# Altium PCB DE-010824.PcbDoc (part 1 of 2)
Units mil, origin at the board's own origin, x right, y up, seen from the top; angles counter-clockwise.
Board outline 4921.26 x 2755.91 mil, 3 copper layers (Top Layer, PWR, Bottom Layer), stack 19.217 mil thick; 221 components, 143 nets, 583 pads, 126 vias.
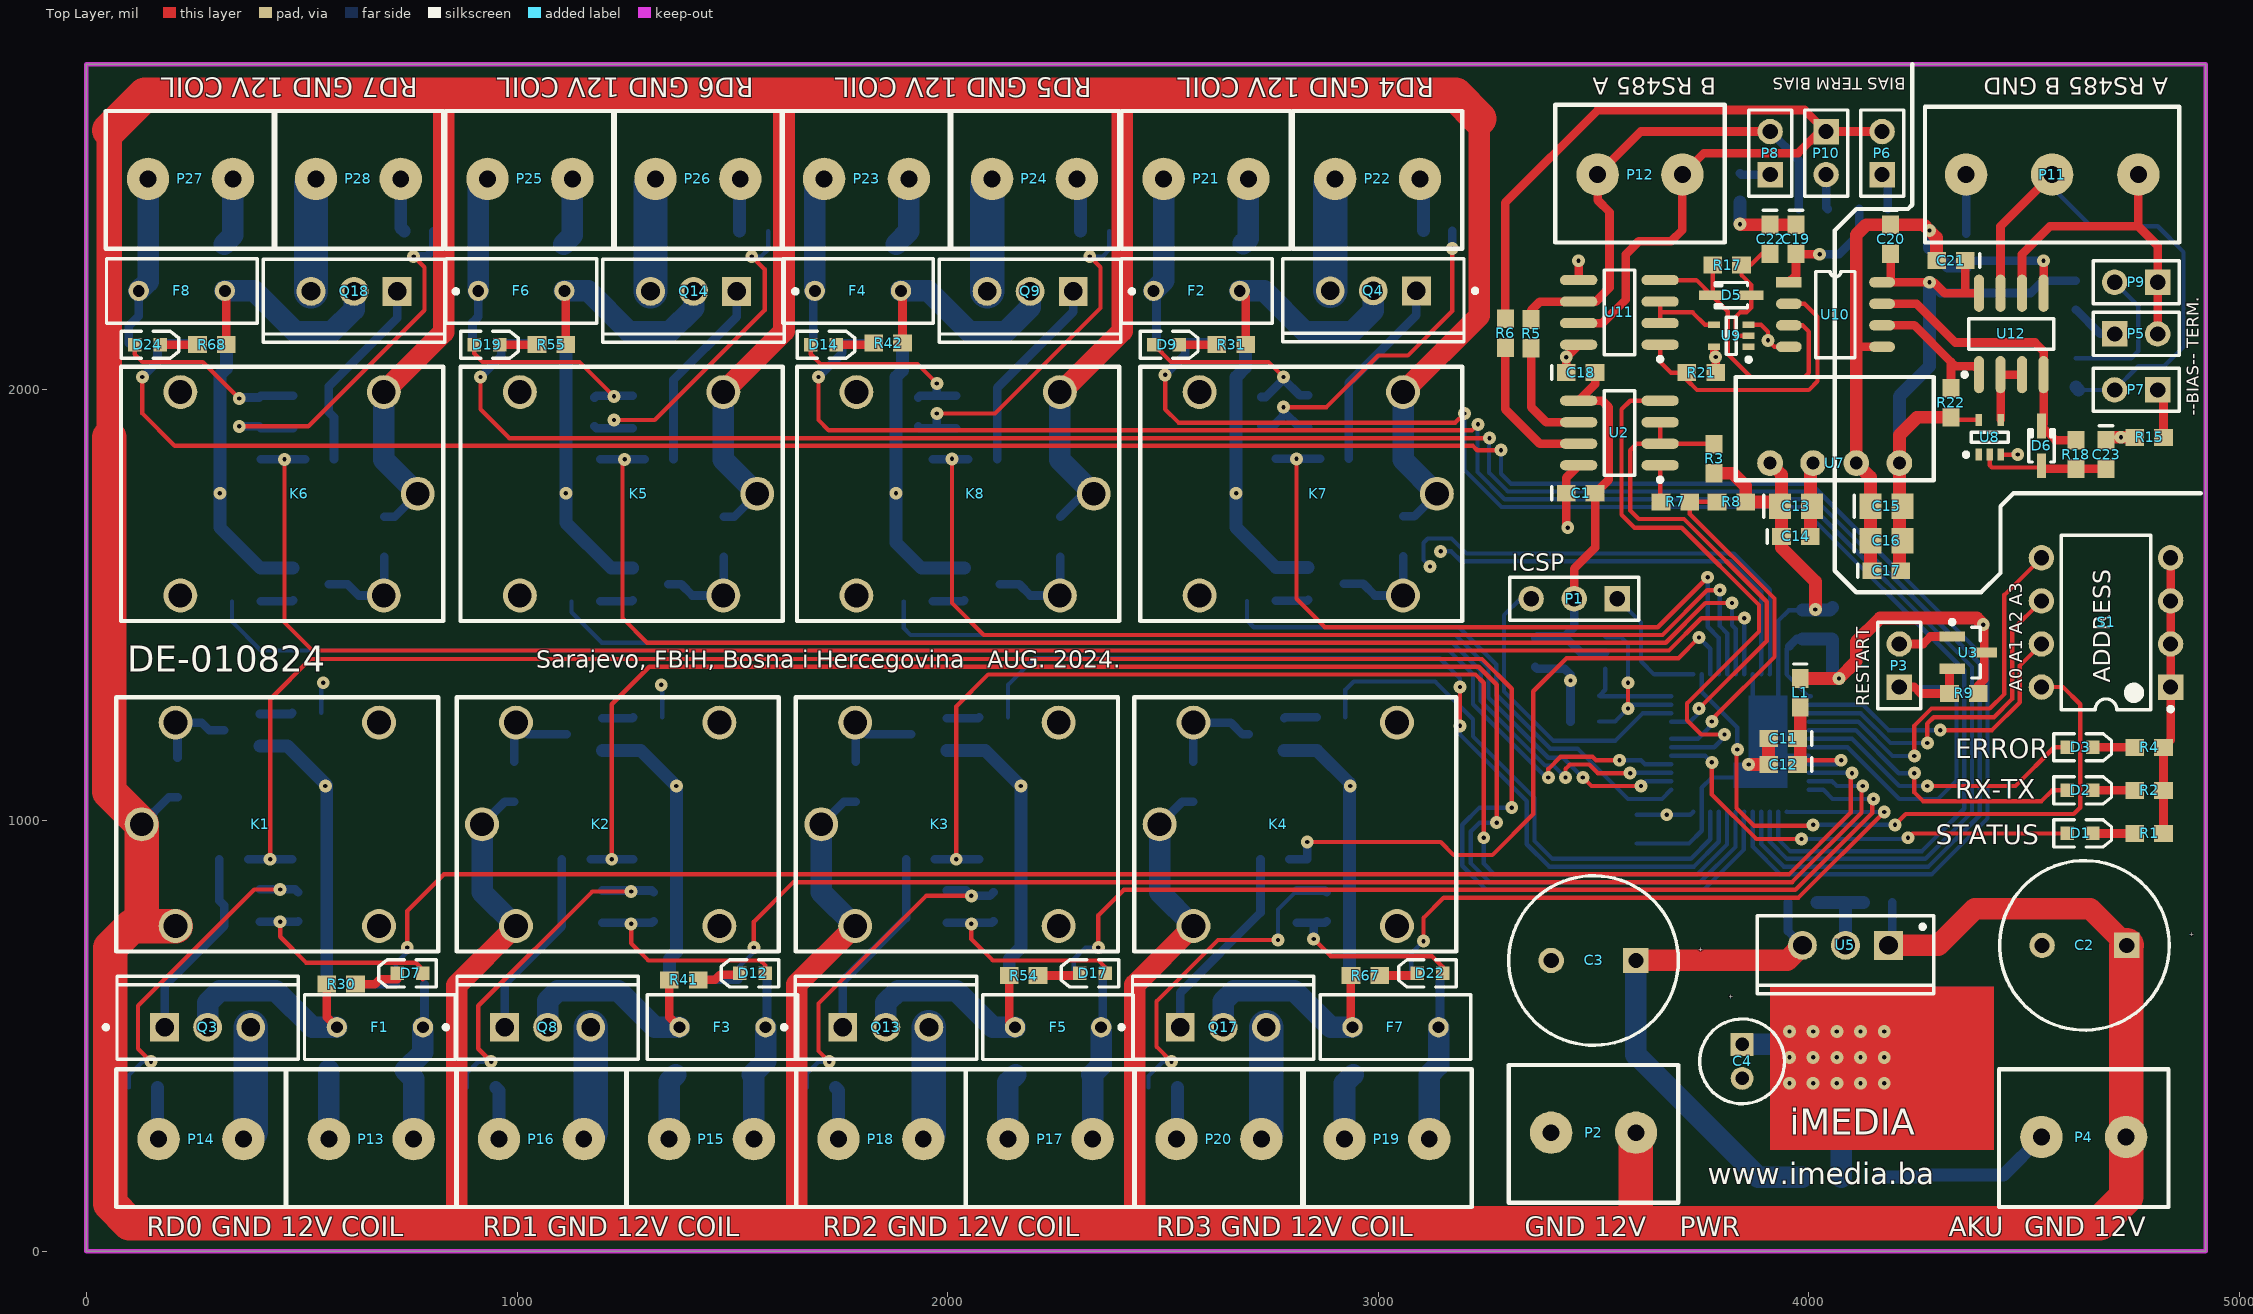
[diagram p0: Top Layer view]
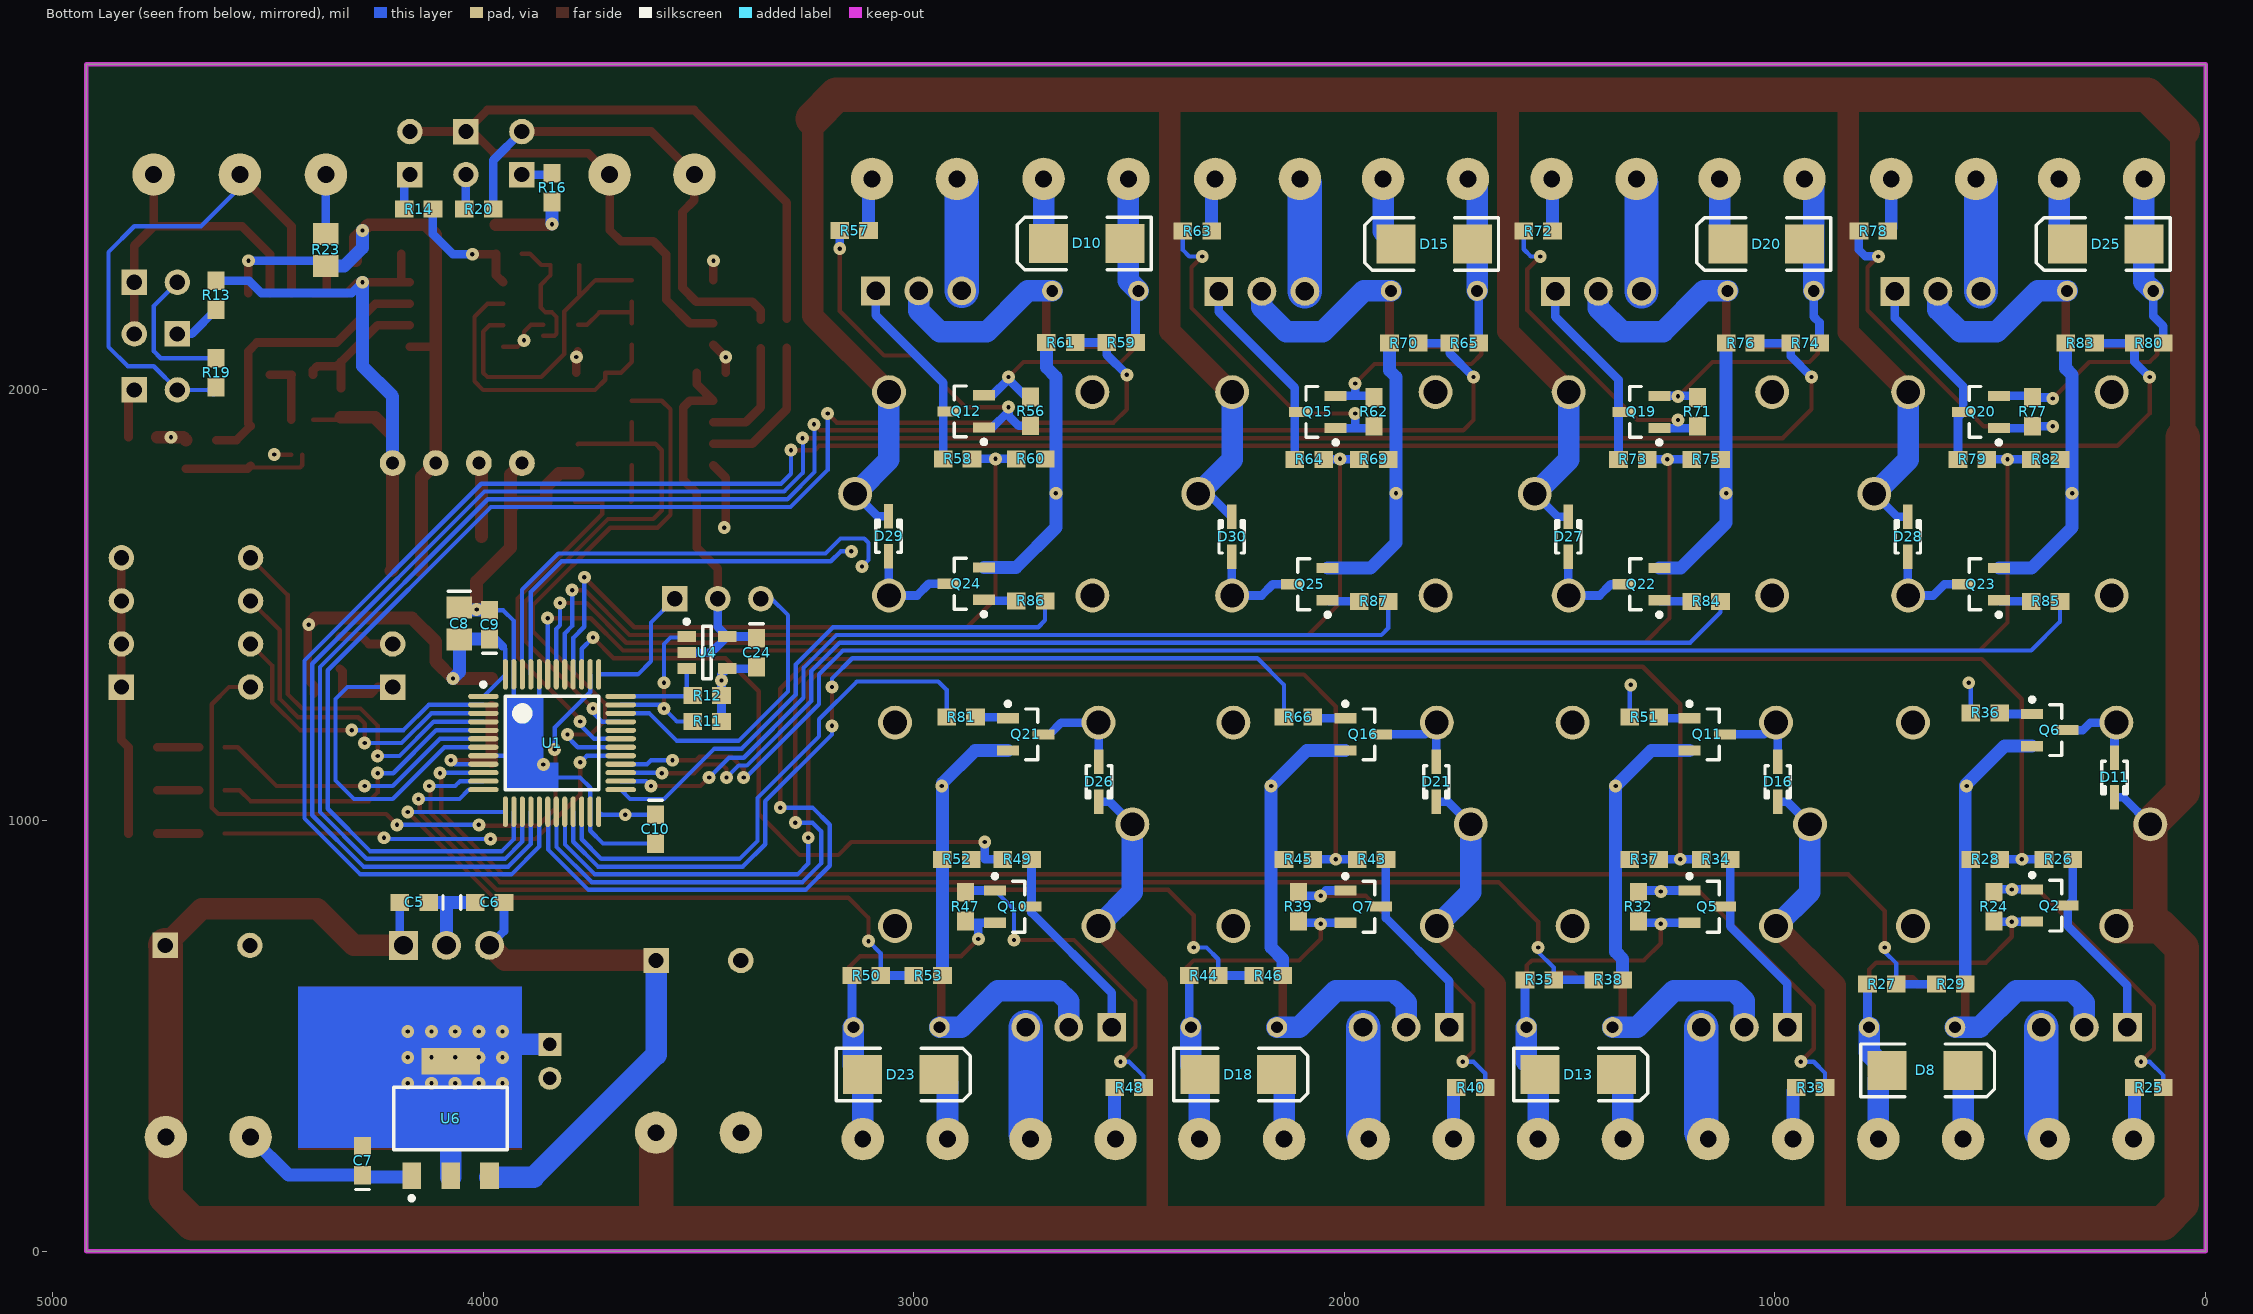
[diagram p1: Bottom Layer view, seen from below]
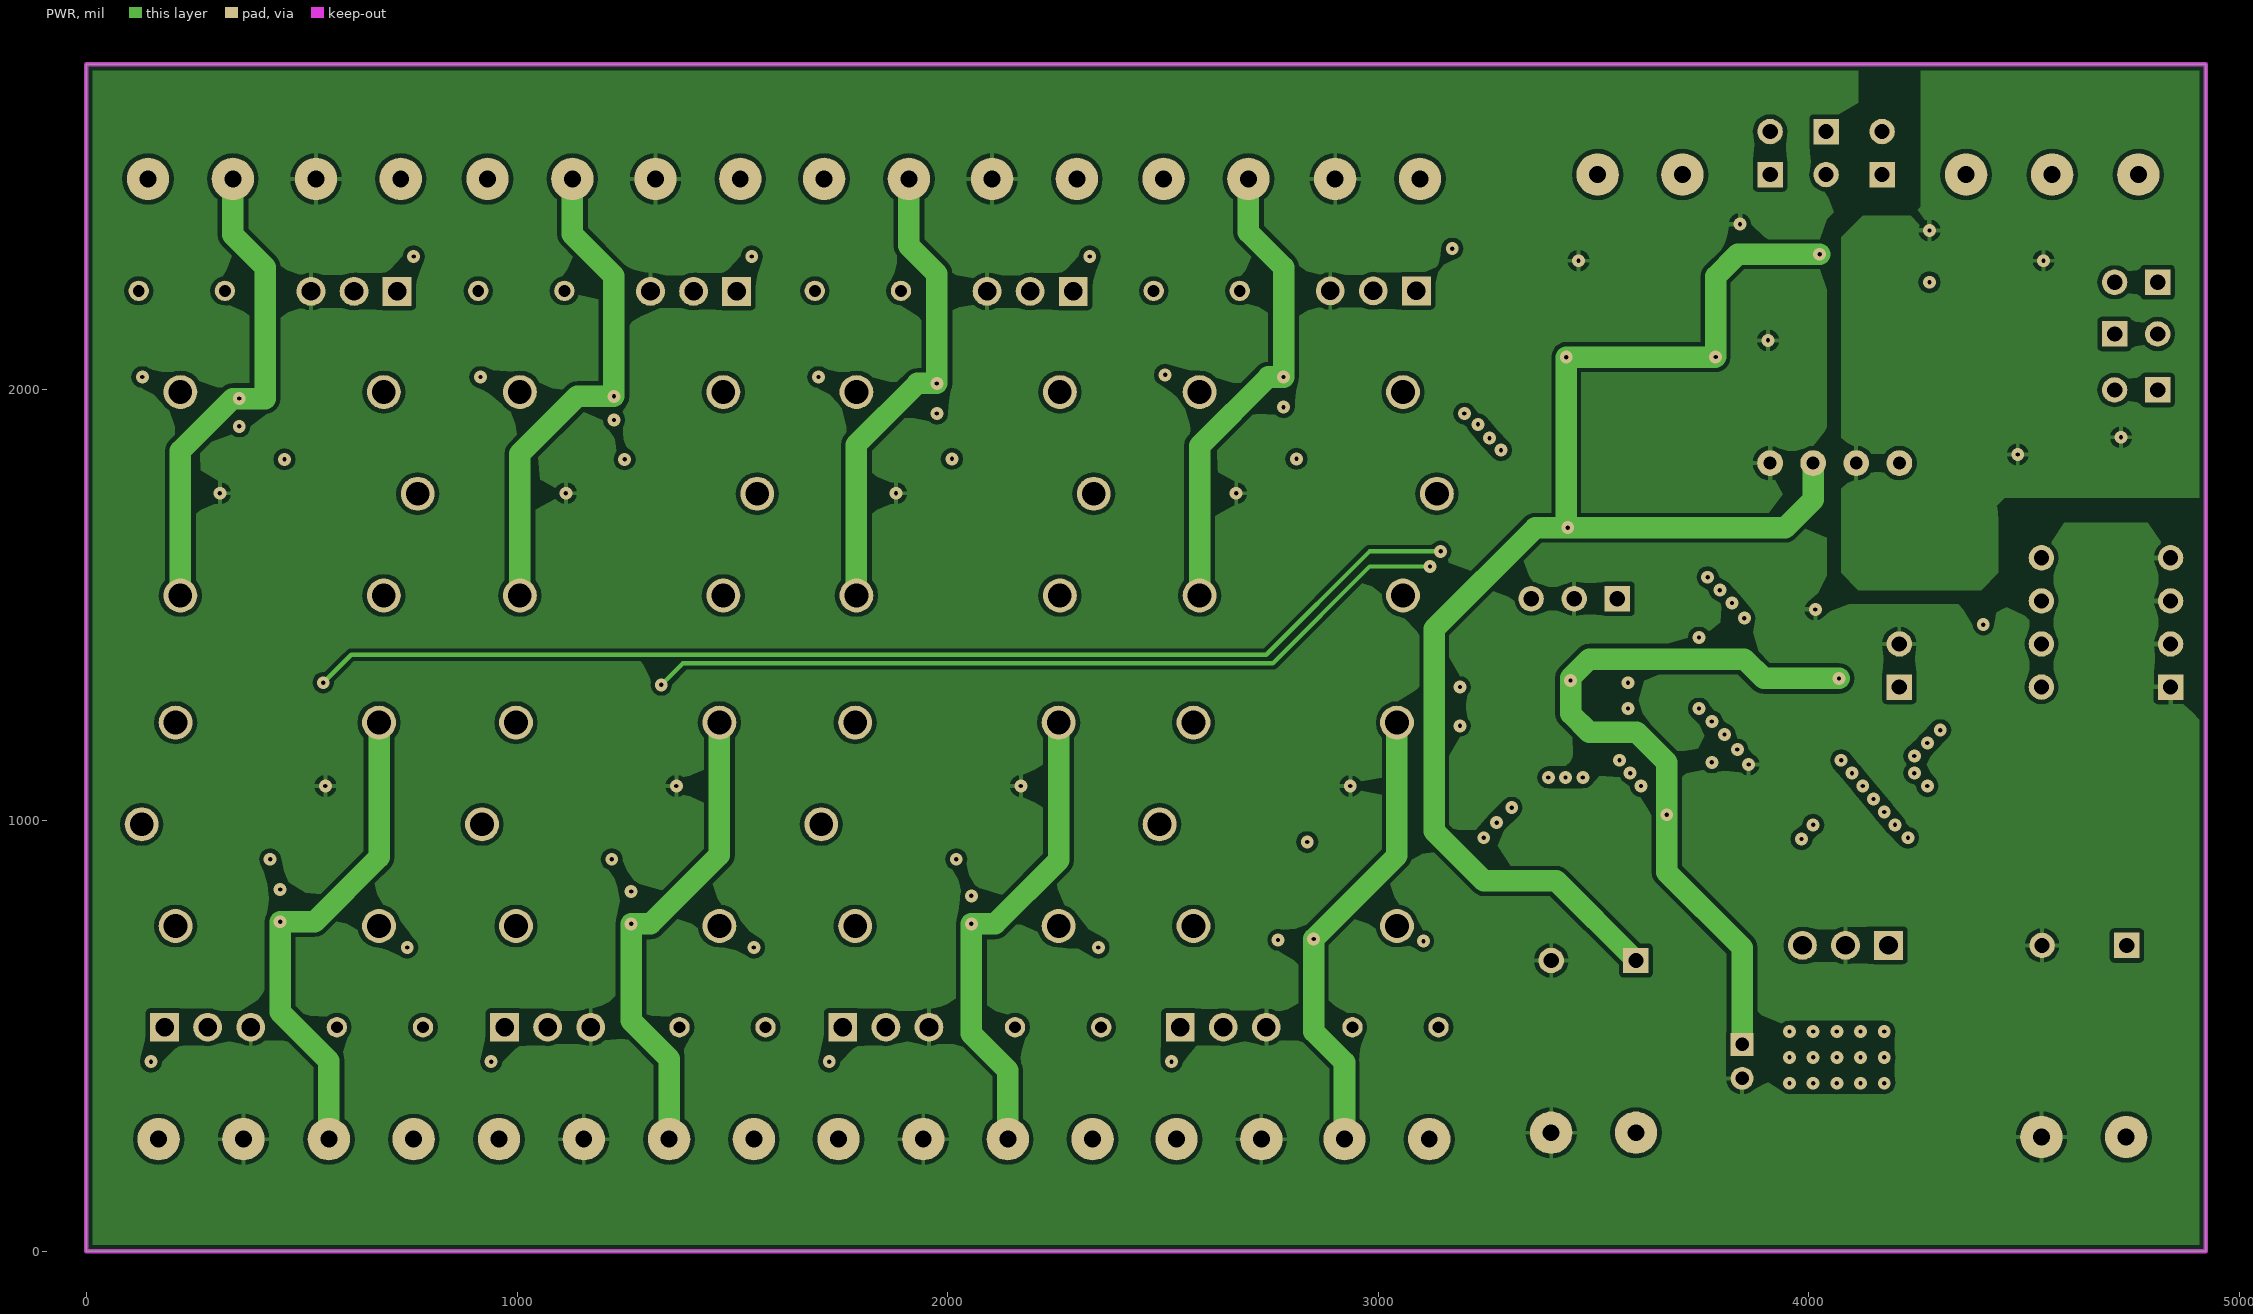
[diagram p2: PWR]

## Layer stack, top to bottom
Top Solder: solder mask 0.4, Solder Resist, Dk 3.5
Top Layer: signal copper 1.4
Dielectric 1: core 10, FR-4, Dk 4.2
PWR: signal copper 1.417
Dielectric 2: prepreg 5, Dk 4.2
Bottom Layer: signal copper 1.4
Bottom Solder: solder mask 0.4, Solder Resist, Dk 3.5

## Board outline
0,0 0,2755.91 4921.26,2755.91 4921.26,0

## Design rules (kind name [scope] priority, off if disabled: settings)
Clearance [All] p1: gap=8 ignorepadtopadclearanceinfootprint=FALSE except(0: Arc-Hole Track-Hole SMDPad-Hole THPad-Hole Via-Hole Fill-Hole Poly-Hole Region-Hole Text-Hole; 5: SMDPad-SMDPad; 10: Arc-Fill Arc-Poly Arc-Region Track-Fill Track-Poly Track-Region SMDPad-Fill SMDPad-Poly SMDPad-Region THPad-Fill THPad-Poly THPad-Region Via-Fill Via-Poly Via-Region Fill-Fill Fill-Poly Fill-Region Poly-Poly Poly-Region Region-Region)
PolygonConnect [All] p1: connectstyle=Relief reliefconductorwidth=10 reliefentries=4 polygonreliefangle="90 Angle" airgapwidth=10
RoutingVias [All] p1: holewidth=28 width=50 viastyle="Through Hole" minholewidth=10 minwidth=30 maxholewidth=28 maxwidth=50
SolderMaskExpansion [All] p1: expansion=4
Width [All] p1: maxlimit=100 minlimit=10 preferedwidth=20
30 further rules are at their usual default settings.

## Classes and differential pairs
component class DE-010824_02: D7 D8 D9 D10 D11 D12 D13 D14 D15 D16 D17 D18 D19 D20 D21 D22 D23 D24 D25 D26 D27 D28 D29 D30 F1 F2 F3 F4 F5 F6 F7 F8 K1 K2 K3 K4 K5 K6 K7 K8 P13 P14 P15 P16 P17 P18 P19 P20 P21 P22 P23 P24 P25 P26 P27 P28 Q2 Q3 Q4 Q5 Q6 Q7 Q8 Q9 Q10 Q11 Q12 Q13 Q14 Q15 Q16 Q17 Q18 Q19 Q20 Q21 Q22 Q23 Q24 Q25 R24 R25 R26 R27 R28 R29 R30 R31 R32 R33 R34 R35 R36 R37 R38 R39 R40 R41 R42 R43 R44 R45 R46 R47 R48 R49 R50 R51 R52 R53 R54 R55 R56 R57 R58 R59 R60 R61 R62 R63 R64 R65 R66 R67 R68 R69 R70 R71 R72 R73 R74 R75 R76 R77 R78 R79 R80 R81 R82 R83 R84 R85 R86 R87
component class DE-010824: C1 C2 C3 C4 C5 C6 C7 C8 C9 C10 C11 C12 C13 C14 C15 C16 C17 C18 C19 C20 C21 C22 C23 C24 D1 D2 D3 D5 D6 L1 P1 P2 P3 P4 P5 P6 P7 P8 P9 P10 P11 P12 R1 R2 R3 R4 R5 R6 R7 R8 R9 R11 R12 R13 R14 R15 R16 R17 R18 R19 R20 R21 R22 R23 S1 U1 U2 U3 U4 U5 U6 U7 U8 U9 U10 U11 U12

## Components (designator, comment, footprint, x,y, rotation, side; value= is the part's Value field where it differs from the comment)
C1 "100nF" 0603 3470,1760 r0 top
C2 "470uF" CAPPR5-10X12.5 4640,710 r180 top
C3 "470uF" CAPPR5-10X12.5 3500,675 r180 top
C4 "22uF" CAPPR2-5X11 3845,440.63 r270 top value=47uF
C5 "100nF" 0603 4160,810 r0 bottom
C6 "100nF" 0603 3985,810 r180 bottom
C7 "100nF" 0603 4280,210 r90 bottom
C8 "10uF" 0805 4055,1457.4 r270 bottom
C9 "100nF" 0603 3985,1455 r90 bottom
C10 "100nF" 0603 3600,980 r270 bottom
C11 "100nF" 0603 3940,1190 r180 top
C12 "1uF" 0603 3940,1130 r180 top value=100nF
C13 "10uF" 0805 3970,1730 r0 top
C14 "100nF" 0603 3970,1660 r0 top
C15 "22uF" 0805 4180,1730 r0 top value=10uF
C16 "22uF" 0805 4180,1650 r0 top value=10uF
C17 "100nF" 0603 4180,1580 r0 top
C18 "100nF" 0603 3470,2040 r0 top
C19 "100nF" 0603 3970,2350 r270 top
C20 "100nF" 0603 4190,2350 r270 top
C21 "100nF" 0603 4330,2300 r180 top
C22 "100pF" 0603 3910,2350 r270 top
C23 "100pF" 0603 4690,1850 r270 top
C24 "100nF" 0603 3365,1390 r270 bottom
D1 "STATUS_LED" 1.6X0.8X0.8 4630,970 r0 top
D2 "STATUS_LED" 1.6X0.8X0.8 4630,1070 r0 top
D3 "STATUS_LED" 1.6X0.8X0.8 4630,1170 r0 top
D5 "1N4148" SOD323 3820,2220 r180 top
D6 "1N4148" SOD323 4540,1870 r90 top
D7 "DOOR_0" 1.6X0.8X0.8 751.57,645 r180 top
D8 "1N4001" SMB 651.57,420 r180 bottom
D9 "DOOR_4" 1.6X0.8X0.8 2508.43,2105 r0 top
D10 "1N4001" SMB 2598.43,2340 r0 bottom
D11 "1N4148" SOD323 211.57,1100 r270 bottom
D12 "DOOR_1" 1.6X0.8X0.8 1547.15,645 r180 top
D13 "1N4001" SMB 1457.15,410 r180 bottom
D14 "DOOR_5" 1.6X0.8X0.8 1711.57,2105 r0 top
D15 "1N4001" SMB 1791.57,2338.78 r0 bottom
D16 "1N4148" SOD323 993.69,1090 r270 bottom
D17 "DOOR_2" 1.6X0.8X0.8 2336.54,645 r180 top
D18 "1N4001" SMB 2246.54,410 r180 bottom
D19 "DOOR_6" 1.6X0.8X0.8 930,2105 r0 top
D20 "1N4001" SMB 1020,2338.78 r0 bottom
D21 "1N4148" SOD323 1786.54,1090 r270 bottom
D22 "DOOR_3" 1.6X0.8X0.8 3120,645 r180 top
D23 "1N4001" SMB 3030,410 r180 bottom
D24 "DOOR_7" 1.6X0.8X0.8 141.57,2105 r0 top
D25 "1N4001" SMB 231.57,2338.78 r0 bottom
D26 "1N4148" SOD323 2570,1090 r270 bottom
D27 "1N4148" SOD323 1480,1658.78 r90 bottom
D28 "1N4148" SOD323 691.57,1658.78 r90 bottom
D29 "1N4148" SOD323 3058.43,1660 r90 bottom
D30 "1N4148" SOD323 2261.57,1658.78 r90 bottom
F1 "Fuse Thermal" RAD-0.2 681.57,520 r0 top
F2 "Fuse Thermal" RAD-0.2 2578.43,2230 r180 top
F3 "Fuse Thermal" RAD-0.2 1477.15,520 r0 top
F4 "Fuse Thermal" RAD-0.2 1791.57,2230 r180 top
F5 "Fuse Thermal" RAD-0.2 2256.54,520 r0 top
F6 "Fuse Thermal" RAD-0.2 1010,2230 r180 top
F7 "Fuse Thermal" RAD-0.2 3040,520 r0 top
F8 "Fuse Thermal" RAD-0.2 221.57,2230 r180 top
K1 "SRD-12VDC-SL-O" SRD-12VDC-SL-O 443.35,991.22 r0 top
K2 "SRD-12VDC-SL-O" SRD-12VDC-SL-O 1233.74,991.22 r0 top
K3 "SRD-12VDC-SL-O" SRD-12VDC-SL-O 2021.5,991.22 r0 top
K4 "SRD-12VDC-SL-O" SRD-12VDC-SL-O 2807.17,991.22 r0 top
K5 "SRD-12VDC-SL-O" SRD-12VDC-SL-O 1242.83,1758.78 r180 top
K6 "SRD-12VDC-SL-O" SRD-12VDC-SL-O 454.41,1758.78 r180 top
K7 "SRD-12VDC-SL-O" SRD-12VDC-SL-O 2821.26,1758.78 r180 top
K8 "SRD-12VDC-SL-O" SRD-12VDC-SL-O 2024.41,1758.78 r180 top
L1 "BLM15AG121" 0603 3980,1296.54 r270 top
P1 "ICSP" HDR1X3 3555,1515 r180 top
P2 "AKU" "TERMINAL BLOK 2" 3500,275 r270 top
P3 "RESET" HDR1X2 4210,1310 r90 top
P4 "PWR_IN" "TERMINAL BLOK 2" 4638.43,265 r270 top
P5 "BIAS" HDR1X2 4710,2130 r0 top
P6 "BIAS" HDR1X2 4170,2500 r90 top
P7 "BIAS" HDR1X2 4810,2000 r180 top
P8 "BIAS" HDR1X2 3910,2500 r90 top
P9 "TERM." HDR1X2 4810,2250 r180 top
P10 "TERM." HDR1X2 4040,2600 r270 top
P11 "RS485" "TERMINAL BLOK 3" 4565,2500 r270 top
P12 "RS485" "TERMINAL BLOK 2" 3607.91,2500 r90 top
P13 "DOOR_0" "TERMINAL BLOK 2" 661.57,260 r90 top
P14 "GND" "TERMINAL BLOK 2" 266.19,260 r90 top
P15 "DOOR_0" "TERMINAL BLOK 2" 1451.57,260 r90 top
P16 "GND" "TERMINAL BLOK 2" 1056.57,260 r90 top
P17 "DOOR_0" "TERMINAL BLOK 2" 2238.11,260 r90 top
P18 "GND" "TERMINAL BLOK 2" 1844.96,260 r90 top
P19 "DOOR_0" "TERMINAL BLOK 2" 3020,260 r90 top
P20 "GND" "TERMINAL BLOK 2" 2630,260 r90 top
P21 "DOOR_0" "TERMINAL BLOK 2" 2600,2490 r270 top
P22 "GND" "TERMINAL BLOK 2" 2998.43,2490 r270 top
P23 "DOOR_0" "TERMINAL BLOK 2" 1811.57,2490 r270 top
P24 "GND" "TERMINAL BLOK 2" 2201.57,2490 r270 top
P25 "DOOR_0" "TERMINAL BLOK 2" 1030,2490 r270 top
P26 "GND" "TERMINAL BLOK 2" 1420,2490 r270 top
P27 "DOOR_0" "TERMINAL BLOK 2" 241.57,2490 r270 top
P28 "GND" "TERMINAL BLOK 2" 631.57,2490 r270 top
Q2 "BC807" SOT23_N 361.57,802.6 r180 bottom
Q3 "NDF10N60ZG" ONSC-TO-220-3-221D-03 281.57,520 r90 top
Q4 "NDF10N60ZG" ONSC-TO-220-3-221D-03 2988.43,2230 r270 top
Q5 "BC807" SOT23_N 1157.15,800 r180 bottom
Q6 "BC817" SOT23_N 361.57,1210 r180 bottom
Q7 "BC807" SOT23_N 1956.54,800 r180 bottom
Q8 "NDF10N60ZG" ONSC-TO-220-3-221D-03 1071.15,520 r90 top
Q9 "NDF10N60ZG" ONSC-TO-220-3-221D-03 2191.57,2228.78 r270 top
Q10 "BC807" SOT23_N 2770,800 r180 bottom
Q11 "BC817" SOT23_N 1157.15,1200 r180 bottom
Q12 "BC807" SOT23_N 2878.43,1950 r0 bottom
Q13 "NDF10N60ZG" ONSC-TO-220-3-221D-03 1856.54,520 r90 top
Q14 "NDF10N60ZG" ONSC-TO-220-3-221D-03 1410,2228.78 r270 top
Q15 "BC807" SOT23_N 2061.57,1948.78 r0 bottom
Q16 "BC817" SOT23_N 1956.54,1200 r180 bottom
Q17 "NDF10N60ZG" ONSC-TO-220-3-221D-03 2640,520 r90 top
Q18 "NDF10N60ZG" ONSC-TO-220-3-221D-03 621.57,2228.78 r270 top
Q19 "BC807" SOT23_N 1310,1948.78 r0 bottom
Q20 "BC807" SOT23_N 521.57,1948.78 r0 bottom
Q21 "BC817" SOT23_N 2740,1200 r180 bottom
Q22 "BC817" SOT23_N 1310,1548.78 r0 bottom
Q23 "BC817" SOT23_N 521.57,1548.78 r0 bottom
Q24 "BC817" SOT23_N 2878.43,1550 r0 bottom
Q25 "BC817" SOT23_N 2080.24,1548.78 r0 bottom
R1 "2K2" ERA-0603 4790,970 r180 top
R2 "2K2" ERA-0603 4790,1070 r180 top
R3 "10K" ERA-0603 3780,1840 r90 top
R4 "2K2" ERA-0603 4790,1170 r180 top
R5 "10R" ERA-0603 3355,2130 r270 top
R6 "10R" ERA-0603 3295,2131.54 r270 top
R7 "1K2" ERA-0603 3690,1740 r180 top
R8 "2K2" ERA-0603 3820,1740 r0 top
R9 "10K" ERA-0603 4360,1295 r0 top
R11 "2K2" ERA-0603 3480,1230 r180 bottom
R12 "2K2" ERA-0603 3480,1290 r180 bottom
R13 "4K7" ERA-0603 4620,2220 r90 bottom
R14 "4K7" ERA-0603 4150,2420 r180 bottom
R15 "4K7" ERA-0603 4790,1890 r180 top
R16 "4K7" ERA-0603 3840,2470 r270 bottom
R17 "10K" ERA-0603 3810,2290 r180 top
R18 "10K" ERA-0603 4620,1850 r90 top
R19 "120R" ERA-0603 4620,2040 r90 bottom
R20 "120R" ERA-0603 4010,2420 r0 bottom
R21 "4K7" ERA-0603 3750,2040 r0 top
R22 "4K7" ERA-0603 4330,1970 r270 top
R23 "100R" ERA-0805 4365,2325 r90 bottom
R24 "10K" ERA-0603 491.57,800 r270 bottom
R25 "10K" ERA-0603 131.57,380 r180 bottom
R26 "12K" ERA-0603 341.95,910 r0 bottom
R27 "12K" ERA-0603 751.57,620 r180 bottom
R28 "4K7" ERA-0603 511.57,910 r180 bottom
R29 "4K7" ERA-0603 591.57,620 r0 bottom
R30 "2K2" ERA-0603 591.57,620 r180 top
R31 "2K2" ERA-0603 2658.43,2105 r0 top
R32 "10K" ERA-0603 1317.15,800 r270 bottom
R33 "10K" ERA-0603 917.15,380 r180 bottom
R34 "12K" ERA-0603 1137.53,910 r0 bottom
R35 "12K" ERA-0603 1547.15,630 r180 bottom
R36 "1K" ERA-0603 511.57,1250 r0 bottom
R37 "4K7" ERA-0603 1303.69,910 r180 bottom
R38 "4K7" ERA-0603 1387.15,630 r0 bottom
R39 "10K" ERA-0603 2106.54,800 r270 bottom
R40 "10K" ERA-0603 1706.54,380 r180 bottom
R41 "2K2" ERA-0603 1387.15,630 r180 top
R42 "2K2" ERA-0603 1861.57,2108.78 r0 top
R43 "12K" ERA-0603 1936.91,910 r0 bottom
R44 "12K" ERA-0603 2326.54,640 r180 bottom
R45 "4K7" ERA-0603 2106.54,910 r180 bottom
R46 "4K7" ERA-0603 2176.54,640 r0 bottom
R47 "10K" ERA-0603 2880,800 r270 bottom
R48 "10K" ERA-0603 2500,380 r180 bottom
R49 "12K" ERA-0603 2760,910 r0 bottom
R50 "12K" ERA-0603 3110,640 r180 bottom
R51 "1K" ERA-0603 1303.69,1240 r0 bottom
R52 "4K7" ERA-0603 2900,910 r180 bottom
R53 "4K7" ERA-0603 2966.54,640 r0 bottom
R54 "2K2" ERA-0603 2176.54,640 r180 top
R55 "2K2" ERA-0603 1080,2105 r0 top
R56 "10K" ERA-0603 2728.43,1950 r90 bottom
R57 "10K" ERA-0603 3138.43,2370 r0 bottom
R58 "12K" ERA-0603 2898.05,1840 r180 bottom
R59 "12K" ERA-0603 2518.43,2110 r0 bottom
R60 "4K7" ERA-0603 2728.43,1840 r0 bottom
R61 "4K7" ERA-0603 2658.43,2110 r180 bottom
R62 "10K" ERA-0603 1931.57,1948.78 r90 bottom
R63 "10K" ERA-0603 2341.57,2368.78 r0 bottom
R64 "12K" ERA-0603 2081.57,1838.78 r180 bottom
R65 "12K" ERA-0603 1721.57,2108.78 r0 bottom
R66 "1K" ERA-0603 2106.54,1240 r0 bottom
R67 "2K2" ERA-0603 2970,640 r180 top
R68 "2K2" ERA-0603 291.57,2105 r0 top
R69 "4K7" ERA-0603 1931.57,1838.78 r0 bottom
R70 "4K7" ERA-0603 1861.57,2108.78 r180 bottom
R71 "10K" ERA-0603 1180,1948.78 r90 bottom
R72 "10K" ERA-0603 1550,2368.78 r0 bottom
R73 "12K" ERA-0603 1330,1838.78 r180 bottom
R74 "12K" ERA-0603 930,2108.78 r0 bottom
R75 "4K7" ERA-0603 1160,1838.78 r0 bottom
R76 "4K7" ERA-0603 1080,2108.78 r180 bottom
R77 "10K" ERA-0603 401.57,1948.78 r90 bottom
R78 "10K" ERA-0603 771.57,2368.78 r0 bottom
R79 "12K" ERA-0603 541.57,1838.78 r180 bottom
R80 "12K" ERA-0603 131.57,2108.78 r0 bottom
R81 "1K" ERA-0603 2890,1240 r0 bottom
R82 "4K7" ERA-0603 371.57,1838.78 r0 bottom
R83 "4K7" ERA-0603 291.57,2108.78 r180 bottom
R84 "1K" ERA-0603 1160,1508.78 r180 bottom
R85 "1K" ERA-0603 371.57,1508.78 r180 bottom
R86 "1K" ERA-0603 2728.43,1510 r180 bottom
R87 "1K" ERA-0603 1931.57,1508.78 r180 bottom
S1 "SW-DIP4" DIP-8 4690,1460 r180 top
U1 "STM32F030C8T6" STM-LQFP48_N 3840,1180 r180 bottom
U2 "SN75176BD" D008_N 3560,1900 r180 top
U3 "TLV803MDBZR" DBZ3_N 4370,1390 r0 top
U4 "24AA01T-I/OT" SOT-23-OT5_N 3480,1390 r180 bottom
U5 "L7805CV" TO220 4085,710 r180 top
U6 "REG1117-3.3" ZZ311 4075.55,307.87 r180 bottom
U7 "B0505S/D-1W" B0505S-1W 3910,1830 r0 top
U8 "SN74LVC1G14" 419A-01_N 4420,1890 r90 top
U9 "SN74LVC1G14" 419A-01_N 3819.65,2125.59 r180 top
U10 "Si8421" SOP8 3953.46,2250 r0 top
U11 "SN75176BD" D008_N 3560,2180 r180 top
U12 "SN75176BD" D008_N 4470,2130 r90 top

## Footprints (in the part's own frame and the unit in brackets; to place one, negate y for a bottom-side part, rotate by r counter-clockwise, add the part's x,y. Pads: shape width x height; smd on the part's side, far side on the other; paste and mask are expansions set on the pad)
1.6X0.8X0.8 [mm] "SM LED; 2 Flat Leads"
  rect 0.8x0.8 smd: 1(-0.75,0) 2(0.75,0)
  silkscreen extent -1.55,-0.8 1.85,0.8
419A-01_N [mm] "SOT353, 5-Leads, Body 2x1.3mm, Pitch 0.65mm, Lead Span 2.1mm, IPC Medium Density"
  rect 0.7x0.4 smd: 1(-1.025,0.65) 2(-1.025,0) 3(-1.025,-0.65) 4(1.025,-0.65) 5(1.025,0.65)
  silkscreen extent -1.15,-1.1 0.3,1.52, body extent -0.7,-1.1 0.7,1.1, height 1.1
0603 [mm] "Chip Capacitor; Body 1.6 x 0.8 mm (LxW typ)"
  rect 1.1x1 smd: 1(-0.85,0) 2(0.85,0)
  silkscreen extent -1.7,-0.4 -1.7,0.4
0805 [mm] "Chip Capacitor; Body 2.0 x 1.2 mm (LxW typ)"
  rect 1.3x1.5 smd: 1(-0.95,0) 2(0.95,0)
  silkscreen extent -1.9,-0.65 -1.9,0.65
B0505S-1W [mil] "Isolated DC DC converter"
  round 60 hole 30: 1(0,0) 2(100,0) 3(200,0) 4(300,0)
  silkscreen extent -80,-40 380,200, body extent -80,-40 380,200, height 394
CAPPR2-5X11 [mm] "Capacitor, Electrolytic, Radial; Body 5 x 11 mm (Dia.xH typ); Pin Spacing 2 mm (typ)"
  rect 1.35x1.35 hole 0.8: 1(-1,0)
  round 1.35 hole 0.8: 2(1,0)
  silkscreen extent -2.5,-2.5 2.5,2.5
CAPPR5-10X12.5 [mm] "Capacitor, Electrolytic, Radial; Body 10 x 12.5 mm (Dia.xH typ); Pin Spacing 5 mm (typ)"
  rect 1.5x1.5 hole 0.9: 1(-2.5,0)
  round 1.5 hole 0.9: 2(2.5,0)
  silkscreen extent -5,-5 5,5, body extent -5,-5 5,5, height 12.5
D008_N [mm] "SOIC, 8-Leads, Body 4.9x3.9mm, Pitch 1.27mm, IPC Medium Density"
  oval 2.2x0.6 smd: 1(-2.4,1.905) 2(-2.4,0.635) 3(-2.4,-0.635) 4(-2.4,-1.905) 5(2.4,-1.905) 6(2.4,-0.635) 7(2.4,0.635) 8(2.4,1.905)
  silkscreen extent -2.53,-2.5 0.9,2.88, body extent -1.95,-2.45 1.95,2.45, height 1.75
DBZ3_N [mm] "SOT23, 3-Leads, Body 2.9x1.3mm, Pitch 0.95mm, Lead Span 2.4mm, IPC Medium Density"
  rect 1.5x0.6 smd: 1(-0.95,0.95) 2(-0.95,-0.95) 3(0.95,0)
  silkscreen extent -1.07,-1.5 0.7,1.92, body extent -0.7,-1.52 0.7,1.52, height 1.12
DIP-8 [mm] "DIP; 8 Leads; Row Spacing 7.62 mm; Pitch 2.54 mm"
  rect 1.5x1.5 hole 0.9: 1(-3.81,3.81)
  round 1.5 hole 0.9: 2(-3.81,1.27) 3(-3.81,-1.27) 4(-3.81,-3.81) 5(3.81,-3.81) 6(3.81,-1.27) 7(3.81,1.27) 8(3.81,3.81)
  silkscreen extent -3.94,-5.15 2.65,5.23, body extent -3.6,-5.15 3.6,5.15, height 5.08
ERA-0603 [mm] "Chip Resistor; Body 1.6 x 0.8 mm (LxW typ)"
  rect 1.1x1 smd: 1(-0.85,0) 2(0.85,0)
ERA-0805 [mm] "Chip Resistor; Body 2 x 1.3 mm (LxW typ)"
  rect 1.3x1.5 smd: 1(-0.95,0) 2(0.95,0)
HDR1X2 [mm] "Connector; Header; 2 Position"
  rect 1.5x1.5 hole 0.9: 1(0,0)
  round 1.5 hole 0.9: 2(2.54,0)
  silkscreen extent -1.27,-1.27 3.81,1.27
HDR1X3 [mm] "Connector; Header; 3 Position"
  rect 1.5x1.5 hole 0.9: 1(0,0)
  round 1.5 hole 0.9: 2(2.54,0) 3(5.08,0)
  silkscreen extent -1.27,-1.27 6.35,1.27
ONSC-TO-220-3-221D-03 [mm] "FM, 3-Leads, Body 10.65x4.9mm, Pitch 2.54mm"
  rect 1.7x1.7 hole 1.1: 1(0,2.54)
  round 1.7 hole 1.1: 2(0,0) 3(0,-2.54)
  silkscreen extent -1.89,-5.35 3.01,6.12, body extent -1.89,-5.33 3.01,5.33, height 19.55
RAD-0.2 [mm] "Radial Cap, Thru-Hole; 2 Leads; 0.2 in Pin Spacing"
  round 1.2 hole 0.7: 1(-2.54,0) 2(2.54,0)
  silkscreen extent -4.44,-1.91 4.44,1.91
SMB [mm] "DO-214-AA/SMB; 2 C-Bend Leads; Body 5.3 x 3.6 mm, inc. leads (LxW)"
  rect 2.3x2.3 smd: 1(-2.25,0) 2(2.25,0)
  silkscreen extent -3.8,-1.55 4.1,1.55
SOD323 [mm] "SOD-323/SC-76; 2 Leads; Body 1.7 x 1.3 mm, (LxW)"
  rect 1.45x0.55 smd: 1(1.175,0) 2(-1.175,0)
  silkscreen extent -0.95,-0.75 0.95,0.75
SOP8 [mm]
  rect 1.52x0.61 smd: 1(0,0)
  oval 1.52x0.61 smd: 2(0,-1.27) 3(0,-2.54) 4(0,-3.81) 5(5.5,-3.81) 6(5.5,-2.54) 7(5.5,-1.27) 8(5.5,0)
  silkscreen extent 1.59,-4.44 3.91,0.64
SOT23_N [mm] "SOT23, 3-Leads, Body 2.9x1.3mm, Pitch 0.95mm, Lead Span 2.3mm, IPC Medium Density"
  rect 1.3x0.6 smd: 1(-1.05,0.95) 2(-1.05,-0.95) 3(1.05,0)
  silkscreen extent -1.18,-1.5 0.7,1.92, body extent -0.7,-1.5 0.7,1.5, height 1.1
SOT-23-OT5_N [mm] "SOT23, 5-Leads, Body 2.9x1.6mm, Pitch 0.95mm, Lead Span 2.7mm, IPC Medium Density"
  rect 1.1x0.65 smd: 1(-1.2,0.95) 2(-1.2,0) 3(-1.2,-0.95) 4(1.2,-0.95) 5(1.2,0.95)
  silkscreen extent -1.33,-1.55 0.25,1.95, body extent -0.9,-1.55 0.9,1.55, height 1.45
SRD-12VDC-SL-O [mm] "Print Relay 12Vdc NC-NO"
  round 2 hole 1.4: 1(-8,0) 2(-6,-6) 3(6,-6) 4(6,6) 5(-6,6)
  silkscreen extent -9.5,-7.5 9.5,7.5, body extent -9.4,-7.62 9.4,7.37, height 16
STM-LQFP48_N [mm] "QFP, 48-Leads, Body 7x7mm, Pitch 0.5mm, IPC Medium Density"
  oval 1.8x0.3 smd: 1(-4.05,2.75) 2(-4.05,2.25) 3(-4.05,1.75) 4(-4.05,1.25) 5(-4.05,0.75) 6(-4.05,0.25) 7(-4.05,-0.25) 8(-4.05,-0.75) 9(-4.05,-1.25) 10(-4.05,-1.75) 11(-4.05,-2.25) 12(-4.05,-2.75) 25(4.05,-2.75) 26(4.05,-2.25) 27(4.05,-1.75) 28(4.05,-1.25) 29(4.05,-0.75) 30(4.05,-0.25) 31(4.05,0.25) 32(4.05,0.75) 33(4.05,1.25) 34(4.05,1.75) 35(4.05,2.25) 36(4.05,2.75)
  oval 0.3x1.8 smd: 13(-2.75,-4.05) 14(-2.25,-4.05) 15(-1.75,-4.05) 16(-1.25,-4.05) 17(-0.75,-4.05) 18(-0.25,-4.05) 19(0.25,-4.05) 20(0.75,-4.05) 21(1.25,-4.05) 22(1.75,-4.05) 23(2.25,-4.05) 24(2.75,-4.05) 37(2.75,4.05) 38(2.25,4.05) 39(1.75,4.05) 40(1.25,4.05) 41(0.75,4.05) 42(0.25,4.05) 43(-0.25,4.05) 44(-0.75,4.05) 45(-1.25,4.05) 46(-1.75,4.05) 47(-2.25,4.05) 48(-2.75,4.05)
  silkscreen extent -4.18,-2.75 2.75,3.57, body extent -3.5,-3.5 3.5,3.5, height 1.6
"TERMINAL BLOK 2" [mm] "Terminal blok 3,5mm"
  round 2.5 hole 1: 1(0,-2.5) 2(0,2.5)
  silkscreen extent -4,-5 4.13,5
"TERMINAL BLOK 3" [mm] "Terminal blok konektor 3 pina"
  round 2.5 hole 1: 1(0,5.08) 2(0,0) 3(0,-5.08)
  silkscreen extent -4,-7.5 4,7.5
TO220 [mm] "TO, Thru-Hole, Vertical, Heatsink Mounted; 3 In-Line Leads; Pitch 2.54 mm"
  rect 1.7x1.7 hole 1.1: 1(-2.54,0)
  round 1.7 hole 1.1: 2(0,0) 3(2.54,0)
  silkscreen extent -5.2,-1.75 5.2,2.85, body extent -5.25,-1.8 5.25,2.9, height 19.7
ZZ311 [mm] "SOT-223/SC-73; 4 Leads; Body 6.7 x 7.3 mm, inc. leads (LxW max)"
  rect 1.1x1.55 smd: 1(-2.3,-3.375) 2(0,-3.375) 3(2.3,-3.375)
  rect 3.45x1.55 smd: 4(0,3.375)
  silkscreen extent -3.35,-4.82 3.35,1.85

## Part data
C1 C5 C6 C7 C9 C10 C11 C12 C14 C17 C18 C19 C20 C21 C22 C23 C24: library part C0603, "Ceramic Chip Capacitor - Standard", PackageDocument=Mar-2001, Code_IPC="1608 [0603]", Code_JEITA=0603, ComponentLink1Description="Manufacturer Link", ComponentLink1URL=http://www.kemet.com/, ComponentLink2Description=Datasheet, ComponentLink2URL=http://www.kemet.com/kemet/web/homepage/kechome.nsf/vapubfilesname/F3102TA.pdf/$file/F3102TA.pdf, DatasheetDocument=Mar-2001, LatestRevisionDate=19-Mar-2004, LatestRevisionNote="Silkscreen size reduced.", Note="Footprint corresponds to dimensions for bulk cassette packaging. This case size has tightened tolerances.", PackageReference=0603, Published=17-Jul-2002, Publisher="Altium Limited"
C2 C3: library part EKA00DC347E00, "Aluminum Electrolytic Capacitor, Radial Style with Long Leads: 470uF, 25V", ComponentLink1Description="Manufacturer Link", ComponentLink1URL=http://www.vishay.com/, ComponentLink2Description=Datasheet, ComponentLink2URL=http://www.vishay.com/docs/25014/eka.pdf, DatasheetDocument=20-Feb-2001, DrillSize="Nominal, Rounded To The Nearest 0.1mm", Note="Refer to Manufacturer's Data Sheets for other lead formations", PackageReference=CAPPR5-10X12.5, Published=19-Mar-2004, Publisher="Altium Limited"
C4: library part EKA00AA247F00, "Aluminum Electrolytic Capacitor, Radial Style with Long Leads: 47uF, 35V", ComponentLink1Description="Manufacturer Link", ComponentLink1URL=http://www.vishay.com/, ComponentLink2Description=Datasheet, ComponentLink2URL=http://www.vishay.com/docs/25014/eka.pdf, DatasheetDocument=20-Feb-2001, DrillSize="Nominal, Rounded To The Nearest 0.1mm", Note="Refer to Manufacturer's Data Sheets for other lead formations", PackageReference=CAPPR2-5X11, Published=19-Mar-2004, Publisher="Altium Limited"
C8 C13 C15 C16: library part C0805, "Ceramic Chip Capacitor - Standard", PackageDocument=Mar-2001, Code_IPC=2012[0805], Code_JEITA=0805, ComponentLink1Description="Manufacturer Link", ComponentLink1URL=http://www.kemet.com/, ComponentLink2Description=Datasheet, ComponentLink2URL=http://www.kemet.com/kemet/web/homepage/kechome.nsf/vapubfilesname/F3102TA.pdf/$file/F3102TA.pdf, DatasheetDocument=Mar-2001, LatestRevisionDate=19-Mar-2004, LatestRevisionNote="Silkscreen size reduced.", Note="Footprint corresponds to dimensions for bulk cassette packaging. This case size has tightened tolerances.", PackageReference=0805, Published=17-Jul-2002, Publisher="Altium Limited"
D1 D2 D3 D7 D9 D12 D14 D17 D19 D22 D24: library part HSMB-C190, "Blue Surface Mount Chip LED, Blue", LED_Colour=Blue, ComponentLink1Description="Manufacturer Link", ComponentLink1URL=http://www.avagotech.com/, ComponentLink2Description=Datasheet, ComponentLink2URL=http://cp.literature.agilent.com/litweb/pdf/5988-5211EN.pdf, DatasheetVersion=26-Feb-2002, LuminousIntensity="1.6mcd (Minimum).", PackageDescription="SM LED; 2 Flat Leads", PackageReference=1.6X0.8X0.8, PackageVersion=Mar-2002, PCB_Layout="Complies with manufacturer's recommendation.", Published=11-Dec-2002, Publisher="Altium Limited"
D5 D6: library part BAS321, "General-purpose Diode", ComponentLink1Description="Manufacturer Link", ComponentLink1URL=http://www.semiconductors.philips.com/, ComponentLink2Description=Datasheet, ComponentLink2URL=http://www.semiconductors.philips.com/acrobat/datasheets/BAS321_2.pdf, DatasheetVersion=9-Feb-1999, LatestRevisionDate=19-Mar-2004, LatestRevisionNote="Silkscreen size reduced.", PackageDescription="SOD-323/SC-76; 2 Leads; Body 1.7 x 1.3 mm, (LxW)", PackageReference=SOD323, PackageVersion=May-1999, Published=17-Sep-2003, Publisher="Altium Limited"
D8 D10 D13 D15 D18 D20 D23 D25: library part "D Schottky", "Schottky Diode", Code_JEDEC=DO-214-AA, LatestRevisionDate=17-Jul-2002, LatestRevisionNote="Re-released for DXP Platform.", PackageDescription="DO-214-AA/SMB; 2 C-Bend Leads; Body 5.3 x 3.6 mm, inc. leads (LxW)", PackageReference=SMB, Published=8-Jun-2000, Publisher="Altium Limited"
D11 D16 D21 D26 D27 D28 D29 D30: library part 1PS76SB10, "Schottky Barrier Diode", ComponentLink1Description="Manufacturer Link", ComponentLink1URL=http://www.semiconductors.philips.com/, ComponentLink2Description=Datasheet, ComponentLink2URL=http://www.semiconductors.philips.com/acrobat/datasheets/1PS76SB10_2.pdf, DatasheetVersion=14-Oct-1996, LatestRevisionDate=19-Mar-2004, LatestRevisionNote="Silkscreen size reduced.", PackageDescription="SOD-323/SC-76; 2 Leads; Body 1.7 x 1.3 mm, (LxW)", PackageReference=SOD323, PackageVersion=May-1999, Published=17-Sep-2003, Publisher="Altium Limited"
F1 F2 F3 F4 F5 F6 F7 F8: "Thermal Fuse", LatestRevisionDate=17-Jul-2002, LatestRevisionNote="Re-released for DXP Platform.", PackageDescription="Thru-Hole; 2 Leads", PackageReference=PIN-W2/E2.8, Published=24-Mar-1999, Publisher="Altium Limited"
K1 K2 K3 K4 K5 K6 K7 K8: "SPDT PCB relay 12Vc coil"
L1: library part "Chip inductor", "SMD chip inductor", Code_IEC=1005, Code_JEITA=0402, LatestRevisionDate=29-May-2009, LatestRevisionNote="IPC-7351 Footprint Added.", PackageDescription="Chip Inductor", PackageReference=0402-A, Published=8-Jun-2000, Publisher="Altium Limited"
P1: library part "Header 3", "Header, 3-Pin", LatestRevisionDate=17-Jul-2002, LatestRevisionNote="Re-released for DXP Platform.", Publisher="Altium Limited"
P2 P4 P12 P13 P14 P15 P16 P17 P18 P19 P20 P21 P22 P23 P24 P25 P26 P27 P28: library part "TERMINAL BLOK 2", "Terminal blok konektor 3,5 mm"
P3 P5 P6 P7 P8 P9 P10: library part "Header 2", "Header, 2-Pin", LatestRevisionDate=17-Jul-2002, LatestRevisionNote="Re-released for DXP Platform.", Publisher="Altium Limited"
P11: library part "TERMINAL BLOK 3", "3 pinski terminal blok konektor"
Q2 Q5 Q7 Q10 Q12 Q15 Q19 Q20: "PNP General-purpose Transistor", ComponentLink1Description="Manufacturer Link", ComponentLink1URL=http://www.semiconductors.philips.com/, ComponentLink2Description=Datasheet, ComponentLink2URL=http://www.semiconductors.philips.com/acrobat/datasheets/BC807_BC807W_BC327_5.pdf, DatasheetVersion=8-Apr-1999, LatestRevisionDate=12-Dec-2006, LatestRevisionNote="IPC-7351 Footprint Added.", PackageDescription="3-Pin SOT-23 Package 0.95 mm Pitch, 2.3 mm Lead Span", PackageReference=SOT23, PackageVersion=May-1999, Published=17-Sep-2003, Publisher="Altium Limited"
Q3 Q4 Q8 Q9 Q13 Q14 Q17 Q18: "N-Channel Power MOSFET 600 V, 0.75 Ohm, 3-Pin TO-220, Pb-Free, Tube", Manufacturer="On Semiconductor", Package Type="TO-220 FULLPAK-3", Channel Polarity="N Channel", Ciss Typ (pF)=1373, ComponentLink1Description="Manufacturer URL", ComponentLink1URL=http://www.onsemi.com/, ComponentLink2Description=Datasheet, ComponentLink2URL=http://www.onsemi.cn/pub_link/Collateral/NDF10N60Z-D.PDF, ComponentLink3Description="Package Specification", ComponentLink3URL=http://www.onsemi.com/pub_link/Collateral/221D-03.PDF, Configuration=Single, Coss Typ (pF)=150, Crss Typ (pF)=35, DatasheetVersion="Rev. 12", Mounting Technology="Through Hole", PackageDescription="3-Pin Flange Mount, Vertical Straight Lead, Body 10.295 x 4.7 mm, Pitch 2.54 mm", PackageReference=TO-220-3-221D-03, PackageVersion="Rev. K, 02/2009", Packing=Tube, PartNumber=NDF10N60ZG, PD Max (W)=39, Qrr Typ (nC)=3000, RoHS=Pb-Free, V(BR)DSS Min (V)=600, VGS(th) Max (V)=4.5, VGS Max (V)=30
Q6 Q11 Q16 Q21 Q22 Q23 Q24 Q25: "NPN General-purpose Transistor", ComponentLink1Description="Manufacturer Link", ComponentLink1URL=http://www.semiconductors.philips.com/, ComponentLink2Description=Datasheet, ComponentLink2URL=http://www.semiconductors.philips.com/acrobat/datasheets/BC817_BC817W_BC337_5.pdf, DatasheetVersion=Jun-1999, LatestRevisionDate=12-Dec-2006, LatestRevisionNote="IPC-7351 Footprint Added.", PackageDescription="3-Pin SOT-23 Package 0.95 mm Pitch, 2.3 mm Lead Span", PackageReference=SOT23, PackageVersion=May-1999, Published=17-Sep-2003, Publisher="Altium Limited"
R1 R2 R3 R4 R5 R6 R7 R8 R9 R11 R12 R13 R14 R15 R16 R17 R18 R19 R20 R21 R22 R24 R25 R26 R27 R28 R29 R30 R31 R32 R33 R34 R35 R36 R37 R38 R39 R40 R41 R42 R43 R44 R45 R46 R47 R48 R49 R50 R51 R52 R53 R54 R55 R56 R57 R58 R59 R60 R61 R62 R63 R64 R65 R66 R67 R68 R69 R70 R71 R72 R73 R74 R75 R76 R77 R78 R79 R80 R81 R82 R83 R84 R85 R86 R87: library part ERAV, "Metal Film Thermosensitive Chip Resistor, 0.56 Ohm to 10k Ohm Range, 5% Tolerance, 0603 Size, 0.063 W", PackageDocument=Mar-2003, Code_IPC="1608 [0603]", ComponentLink1Description="Manufacturer Link", ComponentLink1URL=http://www.panasonic.com/industrial/components/resistive_products.htm, ComponentLink2Description=Datasheet, ComponentLink2URL=http://www.panasonic.com/industrial/components/pdf/AOF0000CE1.pdf, LatestRevisionDate=19-Mar-2004, LatestRevisionNote="Silkscreen size reduced.", Note="If flow soldering, adjust pad width of PCB Footprint to 0.7 - 0.8 times the width of the resistor.", PackageReference=ERA-0603, Published=17-Dec-2003, Publisher="Altium Limited"
R23: library part ERA6Y, "Rectangular Thick Film Chip Resistor, 10 Ohm to 1M Ohm Range, 0.1% and 0.5% Tolerance, 0805 Size, 0.1 W", PackageDocument=Mar-2003, Code_IPC="2012 [0805]", ComponentLink1Description="Manufacturer Link", ComponentLink1URL=http://www.panasonic.com/industrial/components/resistive_products.htm, ComponentLink2Description=Datasheet, ComponentLink2URL=http://www.panasonic.com/industrial/components/pdf/AOA0000CE8.pdf, LatestRevisionDate=19-Mar-2004, LatestRevisionNote="Silkscreen size reduced.", Note="If flow soldering, adjust pad width of PCB Footprint to 0.7 - 0.8 times the width of the resistor.", PackageReference=ERA-0805, Published=17-Dec-2003, Publisher="Altium Limited"
S1: "DIP Switch", LatestRevisionDate=17-Jul-2002, LatestRevisionNote="Re-released for DXP Platform.", PackageReference=DIP-8, Published=24-Mar-1999, Publisher="Altium Limited"
U1: "ARM Cortex-M0 32-bit MCU, 64 KB Flash, 8 KB Internal RAM, 39 I/Os, 48-pin LQFP, -40 to 85 degC, Tray", I/Os (High Current)=39, Operating Frequency(F) (Processor speed) (MHz)=48, Supplier Part Number 1=497-14043-ND, Supply Voltage(Vcc) min (V)=2.4, ComponentLink1Description="Manufacturer URL", ComponentLink1URL=http://www.st.com/web/en/home.html, ComponentLink2Description=Datasheet, ComponentLink2URL=http://www.st.com/st-web-ui/static/active/en/resource/technical/document/datasheet/DM00088500.pdf, ComponentLink3Description="Package Specification", ComponentLink3URL=http://www.st.com/st-web-ui/static/active/en/resource/technical/document/datasheet/DM00058181.pdf, Core="ARM Cortex-M0", DatasheetVersion="Rev. 1", FLASH Size (Prog) (kB)=64, Internal RAM Size (kB)=8, Mounting Technology="Surface Mount", PackageDescription="48-Pin Low Profile Quad Flat Package, 7 x 7 mm Body, 0.5 mm Pitch", PackageReference=LQFP48, PackageVersion="Rev. 6, 06/2013", Packing=Tray, PartNumber=STM32F030C8T6, Supplier 1=Digi-Key, Supplier 2=Newark, Supplier 3=Mouser, Supplier Part Number 2=06X3647, Supplier Part Number 3=511-STM32F030C8T6
U2 U11 U12: "Differential Bus Transceiver", Code_IPC=SOIC127P600-8, ComponentLink1Description="Manufacturer Link", ComponentLink1URL=http://www.ti.com/, ComponentLink2Description=Datasheet, ComponentLink2URL=http://www-s.ti.com/sc/ds/sn75176b.pdf, DatasheetVersion=Sep-1989, LatestRevisionDate=13-Apr-2006, LatestRevisionNote="IPC-7351 Footprint Added.", Note="Receiver Hysteresis of 50mV Typical", PackageDescription="8-Pin Small Outline Integrated Circuit 1.27 mm Pitch", PackageReference=D008, PackageVersion=Jan-1998, Published=15-May-2002, Publisher="Altium Limited"
U3: "Voltage Supervisor with Active-Low, Open Drain Reset, 1 Supply Monitored, -40 to 125 degC, 3-pin SOT-23 (DBZ), Green (RoHS & no Sb/Br)", Manufacturer="Texas Instruments", Rating=Catalog, Supplier Part Number 1=296-29194-2-ND, Threshold Voltage 1 (typ)(Typ)(V)=4.38, # of supplies monitored=1, Code_JEDEC=TO-236-AB, ComponentLink1Description=Datasheet, ComponentLink1URL=http://www.ti.com/general/docs/lit/getliterature.tsp?genericPartNumber=TLV803M&fileType=pdf, DatasheetVersion=SBVS157B, Iq(Typ)(uA)=9, Mounting Technology="Surface Mount", Output Driver Type / Reset Output="Active-low, Open-drain", PackageDescription="3-Pin Plastic Small-Outline Package, 0.95 mm Pitch, 2.4 mm Lead Span", PackageReference=DBZ3, PackageVersion="revB, Apr-2005", PartNumber=TLV803MDBZR, Reset Threshold Accuracy(%)=2, SubFamily="Supervisor and Reset IC", Supplier 1=Digi-Key, Supplier 2=Digi-Key, Supplier 3=Digi-Key, Supplier 4=Newark, Supplier 5=Mouser, Supplier Part Number 2=296-29194-1-ND, Supplier Part Number 3=296-29194-6-ND, Supplier Part Number 4=58T0286, Supplier Part Number 5=595-TLV803MDBZR, Time Delay(ms)=200, VCC(Max)(V)=6, VCC(Min)(V)=1.1
U4: "1Kbit, 400kHz, 1.8V, I2C Serial EEPROM, 5-Pin SOT-23, Industrial Temperature, Tape and Reel", Supplier Part Number 1=24AA01T-I/OTTR-ND, Code_IPC=SOT23-5, ComponentLink1Description=Datasheet, ComponentLink1URL=http://ww1.microchip.com/downloads/en/DeviceDoc/21711J.pdf, ComponentLink2Description="Packaging Specification", ComponentLink2URL=http://www.microchip.com/stellent/groups/techpub_sg/documents/packagingspec/en012702.pdf, ComponentLink3Description="Microchip.com Home", ComponentLink3URL=http://www.microchip.com/, DatasheetVersion="revJ, Jan-2009", PackageDescription="5-Lead Plastic Small Outline Transistor (OT) [SOT-23]", PackageReference=SOT-23-OT5, PackageVersion="revBB, Aug-2009", Published=29-Jan-2009, Publisher="Altium Limited", Supplier 1=Digi-Key, Supplier 2=Digi-Key, Supplier 3=Digi-Key, Supplier 4=Farnell, Supplier Part Number 2=24AA01T-I/OTCT-ND, Supplier Part Number 3=24AA01T-I/OTDKR-ND, Supplier Part Number 4=1331269
U5: "Positive Voltage Regulator, 5V, 3-Pin TO-220", ComponentLink1Description="Manufacturer URL", ComponentLink1URL=http://www.st.com, ComponentLink2Description=Datasheet, ComponentLink2URL=http://www.st.com/internet/com/TECHNICAL_RESOURCES/TECHNICAL_LITERATURE/DATASHEET/CD00000444.pdf, ComponentLink3Description="Package Specification", ComponentLink3URL=http://www.st.com/internet/com/TECHNICAL_RESOURCES/TECHNICAL_LITERATURE/PACKAGE_INFORMATION/CD00004649.pdf, DatasheetVersion=Nov-2011, PackageDescription="TO, Thru-Hole, Vertical, Heatsink Mounted; 3 In-Line Leads; Pitch 2.54 mm", PackageReference=TO220, PackageVersion=ver3.0, PartNumber=L7805CV
U6: "800mA and 1A Low Dropout Positive Regulator 2.85V, 3.3V, 5V, and Adjustable", ComponentLink1Description="Manufacturer Link", ComponentLink1URL=http://www.ti.com/, ComponentLink2Description=Datasheet, ComponentLink2URL=http://www-s.ti.com/sc/ds/REG1117.pdf, DatasheetVersion=Sep-1997, LatestRevisionDate=17-Jul-2002, LatestRevisionNote="Re-released for DXP Platform.", PackageDescription="SOT-223/SC-73; 4 Leads; Body 6.7 x 7.3 mm, inc. leads (LxW max)", PackageReference=ZZ311, PackageVersion=revC, Published=8-Jun-2000, Publisher="Altium Limited"
U7: library part B0505S/D, "1W isolated dc dc converter"
U8 U9: library part MC74VHC1G125DFT1, "Non-Inverting 3-State Buffer", ComponentLink1Description="Manufacturer Link", ComponentLink1URL=http://www.onsemi.com/, ComponentLink2Description=Datasheet, ComponentLink2URL=http://www.onsemi.com/pub/Collateral/MC74VHC1G125-D.PDF, DatasheetVersion=Feb-2000, LatestRevisionDate=12-Dec-2006, LatestRevisionNote="IPC-7351 Footprint Added.", PackageDescription="5-Pin SOT-353 Package 0.65 mm Pitch, 2.1 mm Lead Span", PackageReference=419A-01, PackageVersion=Oct-1999, Published=15-Apr-2002, Publisher="Altium Limited"
U10: "Silicon Labs low power dual chanel digital isolator"

## Via types
v1: diameter 30, hole 10, Top Layer to Bottom Layer, 126 vias

## Nets (pads, with @x,y where several pads share a name; then routed paths per layer and width w, separated by ;. In a path a pad name is that pad's centre, name@x,y a point inside that pad or via, vN(x,y) a via of type N, cw(c..) or ccw(c..) an arc to the next point about the centre after c; other vN are vias at no path point)
3V3: C4.1 C7.2 C8.2 C9.1 C10.1 C24.2 L1.1 R9.2 R11.2 R12.2 U1.1 U1.24 U1.48 U3.3 U4.4 U6.2 U6.4 | length 3338.1
  Top Layer w20: R9.2@4393.46,1295 4393.46,1313.46 4407.4,1327.4 U3.3@4407.4,1390 4407.4,1452.6 v1(4405,1455)
  Top Layer w30: L1.1@3980,1330 v1(4070,1330) 4110,1370 4110,1415 4165,1470 4390,1470 v1(4405,1455)
  PWR w50: C4.1@3845,480 3845,705 3670,880 v1(3670,1013.46) 3670,1135 3600,1205 3490,1205 3446.54,1248.46 v1(3446.54,1325) 3446.54,1331.54 3490,1375 3850,1375 3895,1330 v1(4070,1330)
  Bottom Layer w10: C10.1@3600,1013.46 v1(3670,1013.46) 3724.65,1013.46 U1.24@3731.73,1020.55 ; 3955,1405 3948.27,1398.27 U1.48@3948.27,1339.45 U1.1@3999.45,1288.27 U1.1@4004.45,1288.27 ; C8.2@4053.46,1421.54 C8.2@4055,1420
  Bottom Layer w20: C24.2@3365,1356.54 3368.94,1352.6 U4.4@3432.76,1352.6 3446.54,1338.82 v1(3446.54,1325) R12.2@3446.54,1290 R11.2@3446.54,1230 ; 3955,1405 3971.54,1421.54 C9.1@3985,1421.54
  Bottom Layer w30: C9.1@3985,1421.54 C8.2@4053.46,1421.54 ; C8.2@4055,1420 4055,1345 v1(4070,1330)
  Bottom Layer w50: C4.1@3845,480 3985,480 ; U6.2@4075,172.13 4075,265
  other v1: 3955,390 4010,390 4065,390 4120,390 4175,390 3955,450 4010,450 4065,450 4120,450 4175,450 3955,510 4010,510 4065,510 4120,510 4175,510
5V: C1.1 C3.1 C6.2 C13.2 C14.2 C18.1 C19.2 R14.2 R21.2 U2.8 U5.3 U6.3 U7.2 U9.5 U10.1 U11.8 | length 5332.2
  Top Layer w20: C18.1@3436.54,2040 v1(3436.54,2076.02) U11.8@3465.51,2105 ; v1(3440,1680) 3436.54,1683.46 C1.1@3436.54,1760 3436.54,1796.02 U2.8@3465.51,1825 ; v1@3780,2090 3780,2080 v1(3783.46,2076.54) R21.2@3783.46,2040 ; U10.1@3953.46,2250 3970,2266.54 C19.2@3970,2316.54 3971.54,2315 v1(4025,2315)
  Top Layer w30: C14.2@4003.46,1660 U7.2@4003.46,1823.46
  Top Layer w50: C3.1@3598.43,675 3950,675 U5.3@3985,710
  PWR w50: C3.1@3598.43,675 3413.43,860 3245,860 3130,975 3130,1445 3365,1680 v1(3440,1680) ; U7.2@4010,1830 4010,1745 3945,1680 v1(3440,1680) ; v1(4025,2315) 3835,2315 3783.46,2263.46 v1(3783.46,2076.54) 3782.95,2076.02 v1(3436.54,2076.02) 3436.54,1683.46 v1(3440,1680)
  Bottom Layer w20: C6.2@3951.54,810 3951.54,743.46 U5.3@3985,710 ; v1(4025,2315) 4070,2315 4116.54,2361.54 R14.2@4116.54,2420
  Bottom Layer w50: C3.1@3598.43,675 3598.43,456.57 3882.87,172.13 U6.3@3984.45,172.13
12V: C2.1 C5.2 D11.1 D16.1 D21.1 D26.1 D27.1 D28.1 D29.1 D30.1 K1.1 K1.2 K2.1 K2.2 K3.1 K3.2 K4.1 K4.2 K5.1 K5.2 K6.1 K6.2 K7.1 K7.2 K8.1 K8.2 P2.2 P4.2 U5.1 | length 20010.7
  Top Layer w50: K6.2@690.63,1995 830,2134.37 830,2685 ; 855,65 860,70 860,617.48 K2.2@997.52,755 ; K5.2@1479.06,1995 1620,2135.94 1620,2685 ; 1650,65 1650,619.72 K3.2@1785.28,755 ; K8.2@2260.63,1995 2263.74,1995 2405,2136.26 2405,2685 ; 2435,65 2435,619.06 K4.2@2570.94,755 ; K7.2@3057.48,1995 3235,2172.52 3235,2630 ; U5.1@4185,710 4300,710 4385,795 4653.43,795 C2.1@4738.43,710
  Top Layer w60: 53,1890 53,2603
  Top Layer w80: 53,1890 53,1066.61 K1.1@128.39,991.22 128.39,755 ; 53,2603 135,2685 830,2685 1620,2685 2405,2685 3180,2685 3235,2630 ; K1.2@207.13,755 128.39,755 ; 1645,65 855,65 100,65 55,110 55,705 105,755 128.39,755 ; 1650,65 2435,65 ; 2440,65 3595,65 ; P2.2@3598.43,275 3598.43,68.43 3595,65 ; C2.1@4738.43,710 4736.85,708.43 P4.2@4736.85,265 4736.85,126.85 4675,65 3595,65
  Bottom Layer w20: K1.1@128.39,991.22 190.91,1053.74 D11.1@211.57,1053.74 ; D28.1@691.57,1705.04 715.63,1705.04 K6.1@769.37,1758.78 ; K2.1@918.78,991.22 971.3,1043.74 D16.1@993.69,1043.74 ; D27.1@1480,1705.04 1504.06,1705.04 K5.1@1557.8,1758.78 ; K3.1@1706.54,991.22 1759.06,1043.74 D21.1@1786.54,1043.74 ; D30.1@2261.57,1705.04 2315.31,1758.78 K8.1@2339.37,1758.78 ; K4.1@2492.2,991.22 2544.72,1043.74 D26.1@2570,1043.74 ; D29.1@3058.43,1706.26 3083.7,1706.26 K7.1@3136.22,1758.78 ; U5.1@4185,710 4193.46,718.46 C5.2@4193.46,810
  Bottom Layer w50: K6.2@690.63,1995 690.63,1837.52 K6.1@769.37,1758.78 ; K2.1@918.78,991.22 918.78,833.74 K2.2@997.52,755 ; K5.2@1479.06,1995 1479.06,1837.52 K5.1@1557.8,1758.78 ; K3.1@1706.54,991.22 1706.54,833.74 K3.2@1785.28,755 ; K8.2@2260.63,1995 2260.63,1837.52 K8.1@2339.37,1758.78 ; K4.1@2492.2,991.22 2492.2,833.74 K4.2@2570.94,755 ; K7.2@3057.48,1995 3057.48,1837.52 K7.1@3136.22,1758.78
12V_0: D7.1 D8.2 K1.4 P13.2 Q2.2 R24.2 | length 1825.3
  Top Layer w10: v1(450,765) 450,730 510,670 765,670 781.1,653.9 D7.1@781.1,645 D7.1@781.1,631.75
  PWR w50: P13.2@563.15,260 563.15,441.85 450,555 v1(450,765) 530,765 679.57,914.57 K1.4@679.57,1227.44
  Bottom Layer w20: Q2.2@402.91,765.2 490.24,765.2 R24.2@491.57,766.54
  Bottom Layer w50: D8.2@562.99,420 563.15,419.84 P13.2@563.15,260
12V_1: D12.1 D13.2 K2.4 P15.2 Q5.2 R32.2 | length 1791.5
  Top Layer w10: v1(1265,760) 1265,715 1305,675 1565,675 1576.68,663.32 D12.1@1576.68,645 D12.1@1576.68,641.75
  PWR w50: P15.2@1353.15,260 1353.15,446.85 1265,535 v1(1265,760) 1310,760 1469.96,919.96 K2.4@1469.96,1227.44
  Bottom Layer w20: Q5.2@1198.49,762.6 1313.21,762.6 R32.2@1317.15,766.54
  Bottom Layer w50: P15.2@1353.15,260 1353.15,394.58 D13.2@1368.57,410
12V_2: D17.1 D18.2 K3.4 P17.2 Q7.2 R39.2 | length 1773.9
  Top Layer w10: v1(2055,760) 2055,725 2105,675 2350,675 2366.06,658.94 D17.1@2366.06,645
  PWR w50: P17.2@2139.68,260 2139.68,420.32 2055,505 v1(2055,760) 2110,760 2257.72,907.72 K3.4@2257.72,1227.44
  Bottom Layer w20: Q7.2@1997.87,762.6 2102.6,762.6 R39.2@2106.54,766.54
  Bottom Layer w50: P17.2@2139.68,260 2139.68,391.73 D18.2@2157.95,410
12V_3: D22.1 D23.2 K4.4 P19.2 Q10.2 R47.2 | length 1685
  Top Layer w10: v1(2850,725) 2890,685 3125,685 3149.53,660.47 D22.1@3149.53,645
  PWR w50: P19.2@2921.57,260 2921.57,438.43 2850,510 v1(2850,725) 3043.39,918.39 K4.4@3043.39,1227.44
  Bottom Layer w20: Q10.2@2811.34,762.6 2850,762.6 ; v1(2850,725) 2850,762.6 ; R47.2@2880,766.54 2876.06,762.6 2850,762.6
  Bottom Layer w50: P19.2@2921.57,260 2921.57,390.16 D23.2@2941.42,410
12V_4: D9.1 D10.2 K7.4 P21.2 Q12.2 R56.2 | length 1730.8
  Top Layer w10: D9.1@2478.9,2105 2518.9,2065 2745,2065 v1(2780,2030)
  PWR w50: K7.4@2585.04,1522.56 2585.04,1870.04 2745,2030 v1(2780,2030) 2780,2285 2698.43,2366.57 P21.2@2698.43,2490
  Bottom Layer w20: R56.2@2728.43,1983.46 2738.46,1983.46 2780,2025 2817.6,1987.4 Q12.2@2837.09,1987.4
  Bottom Layer w50: D10.2@2687.01,2340 2698.43,2351.42 P21.2@2698.43,2490
12V_5: D14.1 D15.2 K8.4 P23.2 Q15.2 R62.2 | length 1723.9
  Top Layer w10: D14.1@1682.05,2105 1682.05,2082.95 1705,2060 1930,2060 v1(1975,2015)
  PWR w50: K8.4@1788.19,1522.56 1788.19,1873.19 1930,2015 v1(1975,2015) 1975,2270 1910,2335 P23.2@1910,2490
  Bottom Layer w20: R62.2@1931.57,1982.24 1935.51,1986.18 1975,1986.18 ; v1(1975,2015) 1975,1986.18 ; Q15.2@2020.24,1986.18 1975,1986.18
  Bottom Layer w50: D15.2@1880.16,2338.78 1910,2368.62 P23.2@1910,2490
12V_6: D19.1 D20.2 K5.4 P25.2 Q19.2 R71.2 | length 1783.7
  Top Layer w10: D19.1@900.47,2105 900.47,2084.53 920,2065 1145,2065 v1(1225,1985)
  PWR w50: K5.4@1006.61,1522.56 1006.61,1851.61 1140,1985 v1(1225,1985) 1225,2265 1128.43,2361.57 P25.2@1128.43,2490
  Bottom Layer w20: R71.2@1180,1982.24 1183.94,1986.18 Q19.2@1268.66,1986.18
  Bottom Layer w50: D20.2@1108.58,2338.78 1128.43,2358.62 P25.2@1128.43,2490
12V_7: D24.1 D25.2 K6.4 P27.2 Q20.2 R77.2 | length 1718.8
  Top Layer w10: D24.1@112.05,2105 112.05,2082.95 130,2065 270,2065 v1(355,1980)
  PWR w50: K6.4@218.19,1522.56 218.19,1858.19 340,1980 v1(355,1980) 415,1980 415,2285 340,2360 P27.2@340,2490
  Bottom Layer w20: v1(355,1980) 357.24,1982.24 R77.2@401.57,1982.24 405.51,1986.18 Q20.2@480.24,1986.18
  Bottom Layer w50: D25.2@320.16,2338.78 340,2358.62 P27.2@340,2490
_DOOR_0: Q2.3 Q3.1 R26.1 | length 452.3
  Bottom Layer w20: Q3.1@181.57,520 181.57,616.57 320.24,755.24 Q2.3@320.24,802.6 308.49,814.35 R26.1@308.49,910
_DOOR_1: Q5.3 Q8.1 R34.1 | length 445.1
  Bottom Layer w20: Q8.1@971.15,520 971.15,621.15 1104.06,754.06 R34.1@1104.06,910
_DOOR_2: Q7.3 Q13.1 R43.1 | length 450.9
  Bottom Layer w20: Q13.1@1756.54,520 1756.54,626.54 1903.45,773.45 R43.1@1903.45,910
_DOOR_3: Q10.3 Q17.1 R49.1 | length 467.3
  Bottom Layer w20: Q17.1@2540,520 2540,600 2726.54,786.54 R49.1@2726.54,910
_DOOR_4: Q4.1 Q12.3 R58.1 | length 455
  Bottom Layer w20: R58.1@2931.51,1840 2931.51,2016.51 3088.43,2173.43 Q4.1@3088.43,2230
_DOOR_5: Q9.1 Q15.3 R64.1 | length 463.1
  Bottom Layer w20: R64.1@2115.04,1838.78 2115.04,2005.04 2291.57,2181.57 Q9.1@2291.57,2228.78
_DOOR_6: Q14.1 Q19.3 R73.1 | length 450.7
  Bottom Layer w20: R73.1@1363.46,1838.78 1363.46,2023.46 1510,2170 Q14.1@1510,2228.78
_DOOR_7: Q18.1 Q20.3 R79.1 | length 460.7
  Bottom Layer w20: R79.1@575.04,1838.78 575.04,1936.65 Q20.3@562.91,1948.78 562.91,2007.91 721.57,2166.57 Q18.1@721.57,2228.78
COM_LED: D2.1 U1.5 | length 720
  Top Layer w10: v1@4255,1110 4245,1100 4245,1065 4265,1045 4540,1045 4565,1070 D2.1@4600.47,1070
  Bottom Layer w10: U1.5@3999.45,1209.53 4109.11,1209.53 4208.63,1110 v1(4245,1110) v1@4255,1110
DOOR_0: D8.1 F1.2 P13.1 R27.1 | length 386.8
  Bottom Layer w10: F1.2@781.57,520 F1.2@785.04,523.46
  Bottom Layer w20: F1.2@785.04,523.46 R27.1@785.04,620
  Bottom Layer w50: P13.1@760,260 760,400.16 D8.1@740.16,420 781.57,461.42 F1.2@781.57,520
DOOR_1: D13.1 F3.2 P15.1 R35.1 | length 386.2
  Bottom Layer w10: F3.2@1577.15,520 F3.2@1580.61,523.46
  Bottom Layer w20: F3.2@1580.61,523.46 R35.1@1580.61,630
  Bottom Layer w50: P15.1@1550,260 1550,405.73 D13.1@1545.73,410 1577.15,441.42 F3.2@1577.15,520
DOOR_2: D18.1 F5.2 P17.1 R44.1 | length 390.9
  Bottom Layer w10: F5.2@2356.54,520 F5.2@2360,523.46
  Bottom Layer w20: F5.2@2360,523.46 R44.1@2360,640
  Bottom Layer w50: P17.1@2336.54,260 2336.54,408.58 D18.1@2335.12,410 2356.54,431.42 F5.2@2356.54,520
DOOR_3: D23.1 F7.2 P19.1 R50.1 | length 390.4
  Bottom Layer w10: F7.2@3140,520 F7.2@3143.46,523.46
  Bottom Layer w20: F7.2@3143.46,523.46 R50.1@3143.46,640
  Bottom Layer w50: P19.1@3118.43,260 3118.43,409.84 D23.1@3118.58,410 3140,431.42 F7.2@3140,520
DOOR_4: D10.1 F2.2 P21.1 R59.1 | length 392.3
  Bottom Layer w20: F2.2@2478.43,2230 2484.96,2223.46 R59.1@2484.96,2110
  Bottom Layer w50: F2.2@2478.43,2230 2501.57,2253.15 P21.1@2501.57,2490
DOOR_5: D15.1 F4.2 P23.1 R65.1 | length 391.6
  Bottom Layer w20: R65.1@1688.11,2108.78 1688.11,2226.54 F4.2@1691.57,2230
  Bottom Layer w50: F4.2@1691.57,2230 1691.57,2468.43 P23.1@1713.15,2490
DOOR_6: D20.1 F6.2 P25.1 R74.1 | length 395.7
  Bottom Layer w20: R74.1@896.54,2108.78 896.54,2156.54 910,2170 F6.2@910,2230
  Bottom Layer w50: F6.2@910,2230 910,2468.43 P25.1@931.57,2490
DOOR_7: D25.1 F8.2 P27.1 R80.1 | length 399.9
  Bottom Layer w20: R80.1@98.11,2108.78 98.11,2148.11 121.57,2171.57 F8.2@121.57,2230
  Bottom Layer w50: F8.2@121.57,2230 143.15,2251.57 P27.1@143.15,2490
ERROR_LED: D3.1 U1.6 | length 693.8
  Top Layer w10: v1(4275,1080) 4480,1080 4570,1170 D3.1@4600.47,1170
  Bottom Layer w10: U1.6@3999.45,1189.84 4100.16,1189.84 4210,1080 v1(4275,1080) v1@4285,1080
FB_DOOR_0: R27.2 R29.2 U1.10 | length 3914.7
  Top Layer w10: v1(745,705) 745,790 830,875 3953.63,875 4097,1018.37 4097,1107 v1(4100,1110)
  Bottom Layer w10: R27.2@718.11,620 718.11,668.11 745,695 v1(745,705) ; U1.10@3999.45,1111.1 4098.9,1111.1 v1(4100,1110)
  Bottom Layer w20: R29.2@625.04,620 R27.2@718.11,620